# Altium PCB PCB.PcbDoc
Units mil, origin at the board's own origin, x right, y up, seen from the top; angles counter-clockwise.
Board outline 2380 x 2345 mil, 2 copper layers (Top Layer, Bottom Layer); 17 components, 16 nets, 111 pads, 3 vias.
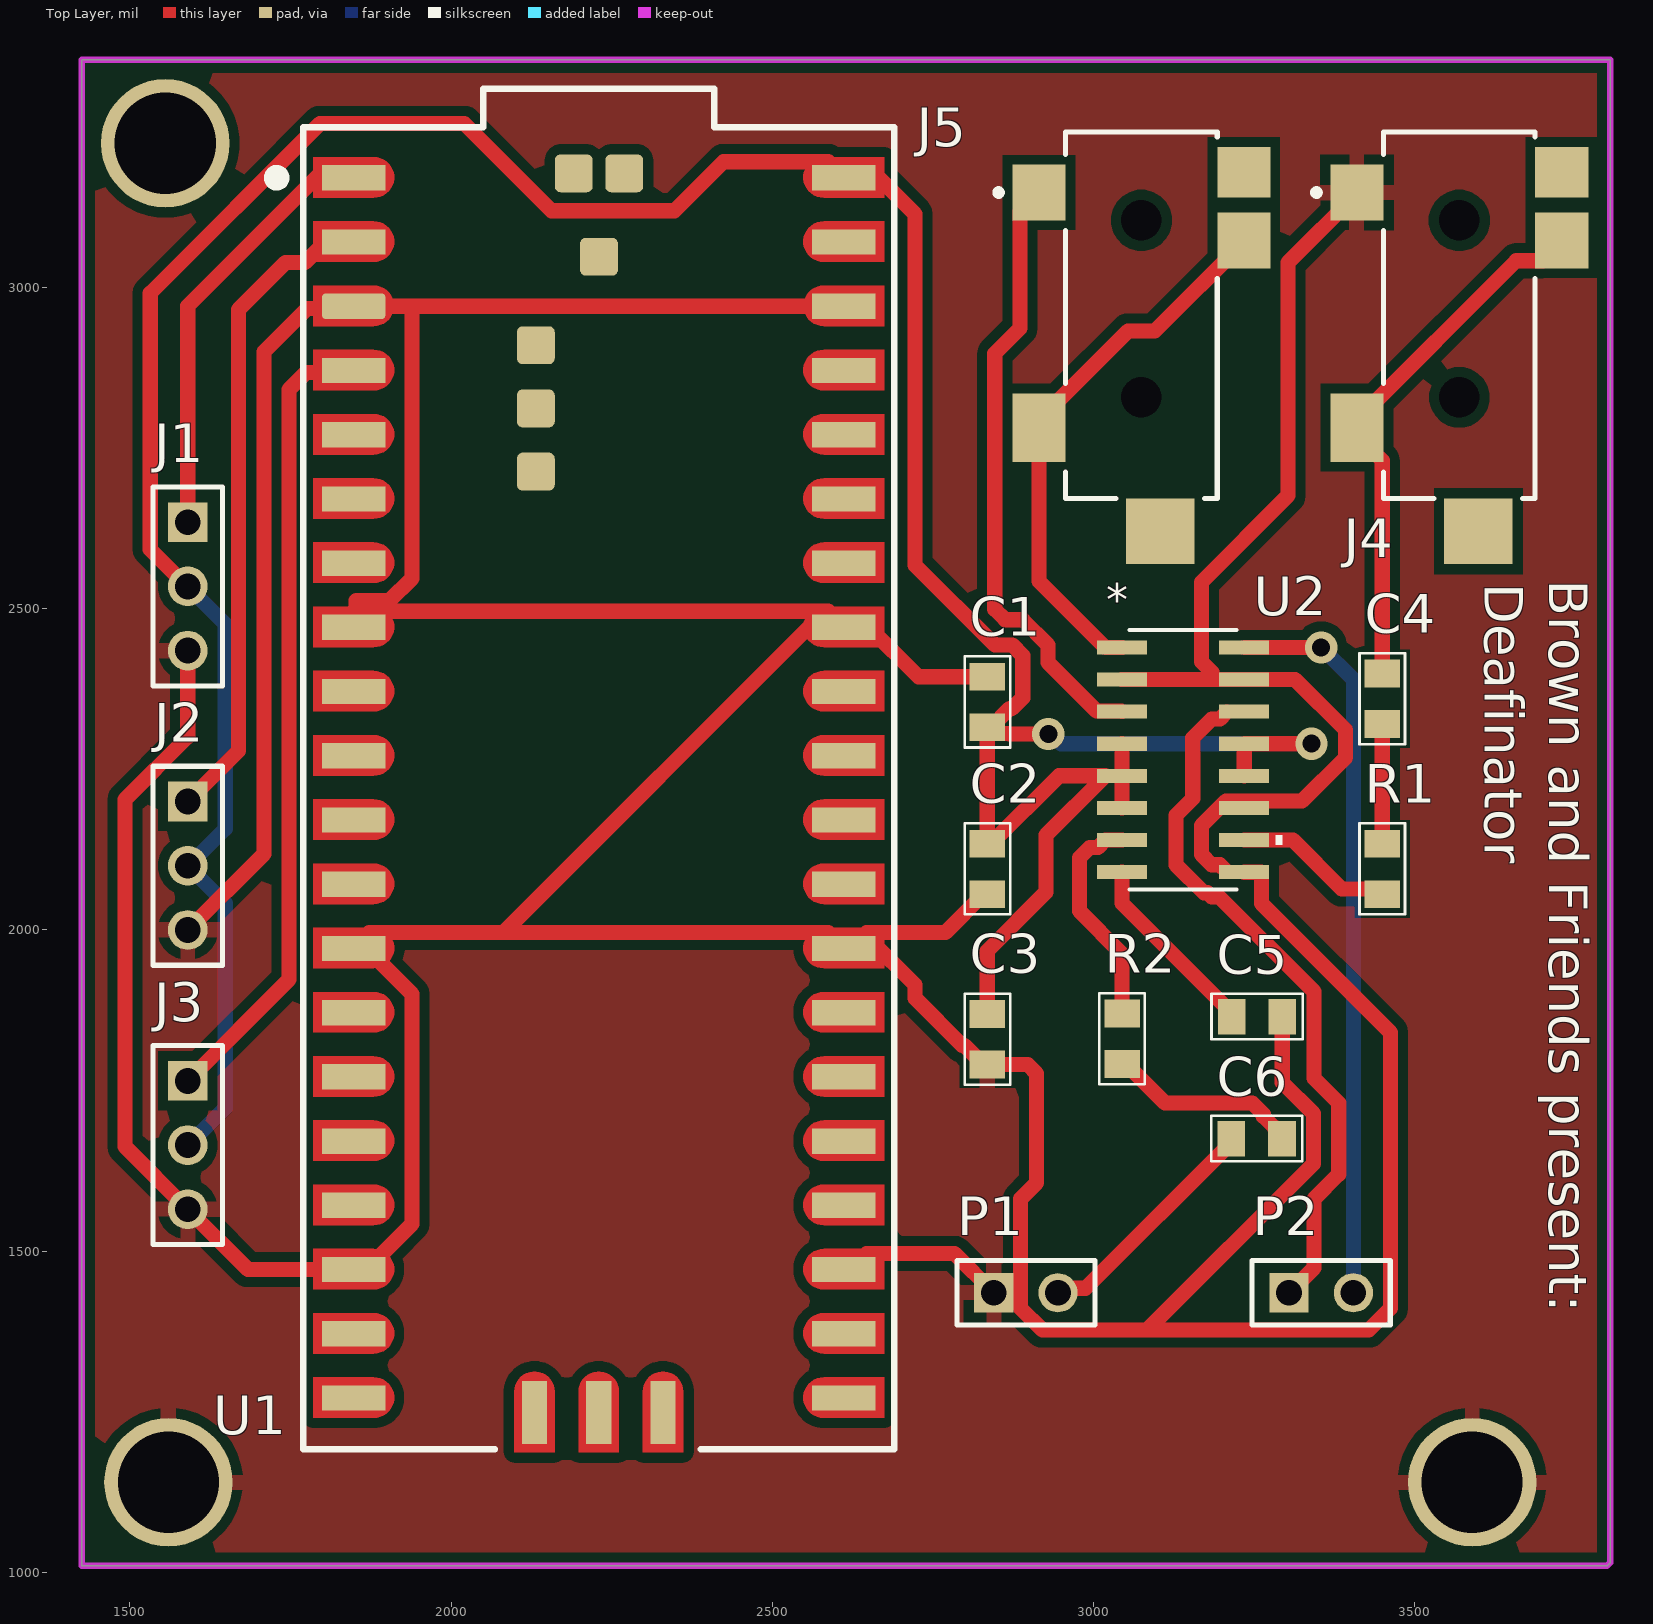
[diagram p0: Top Layer view]
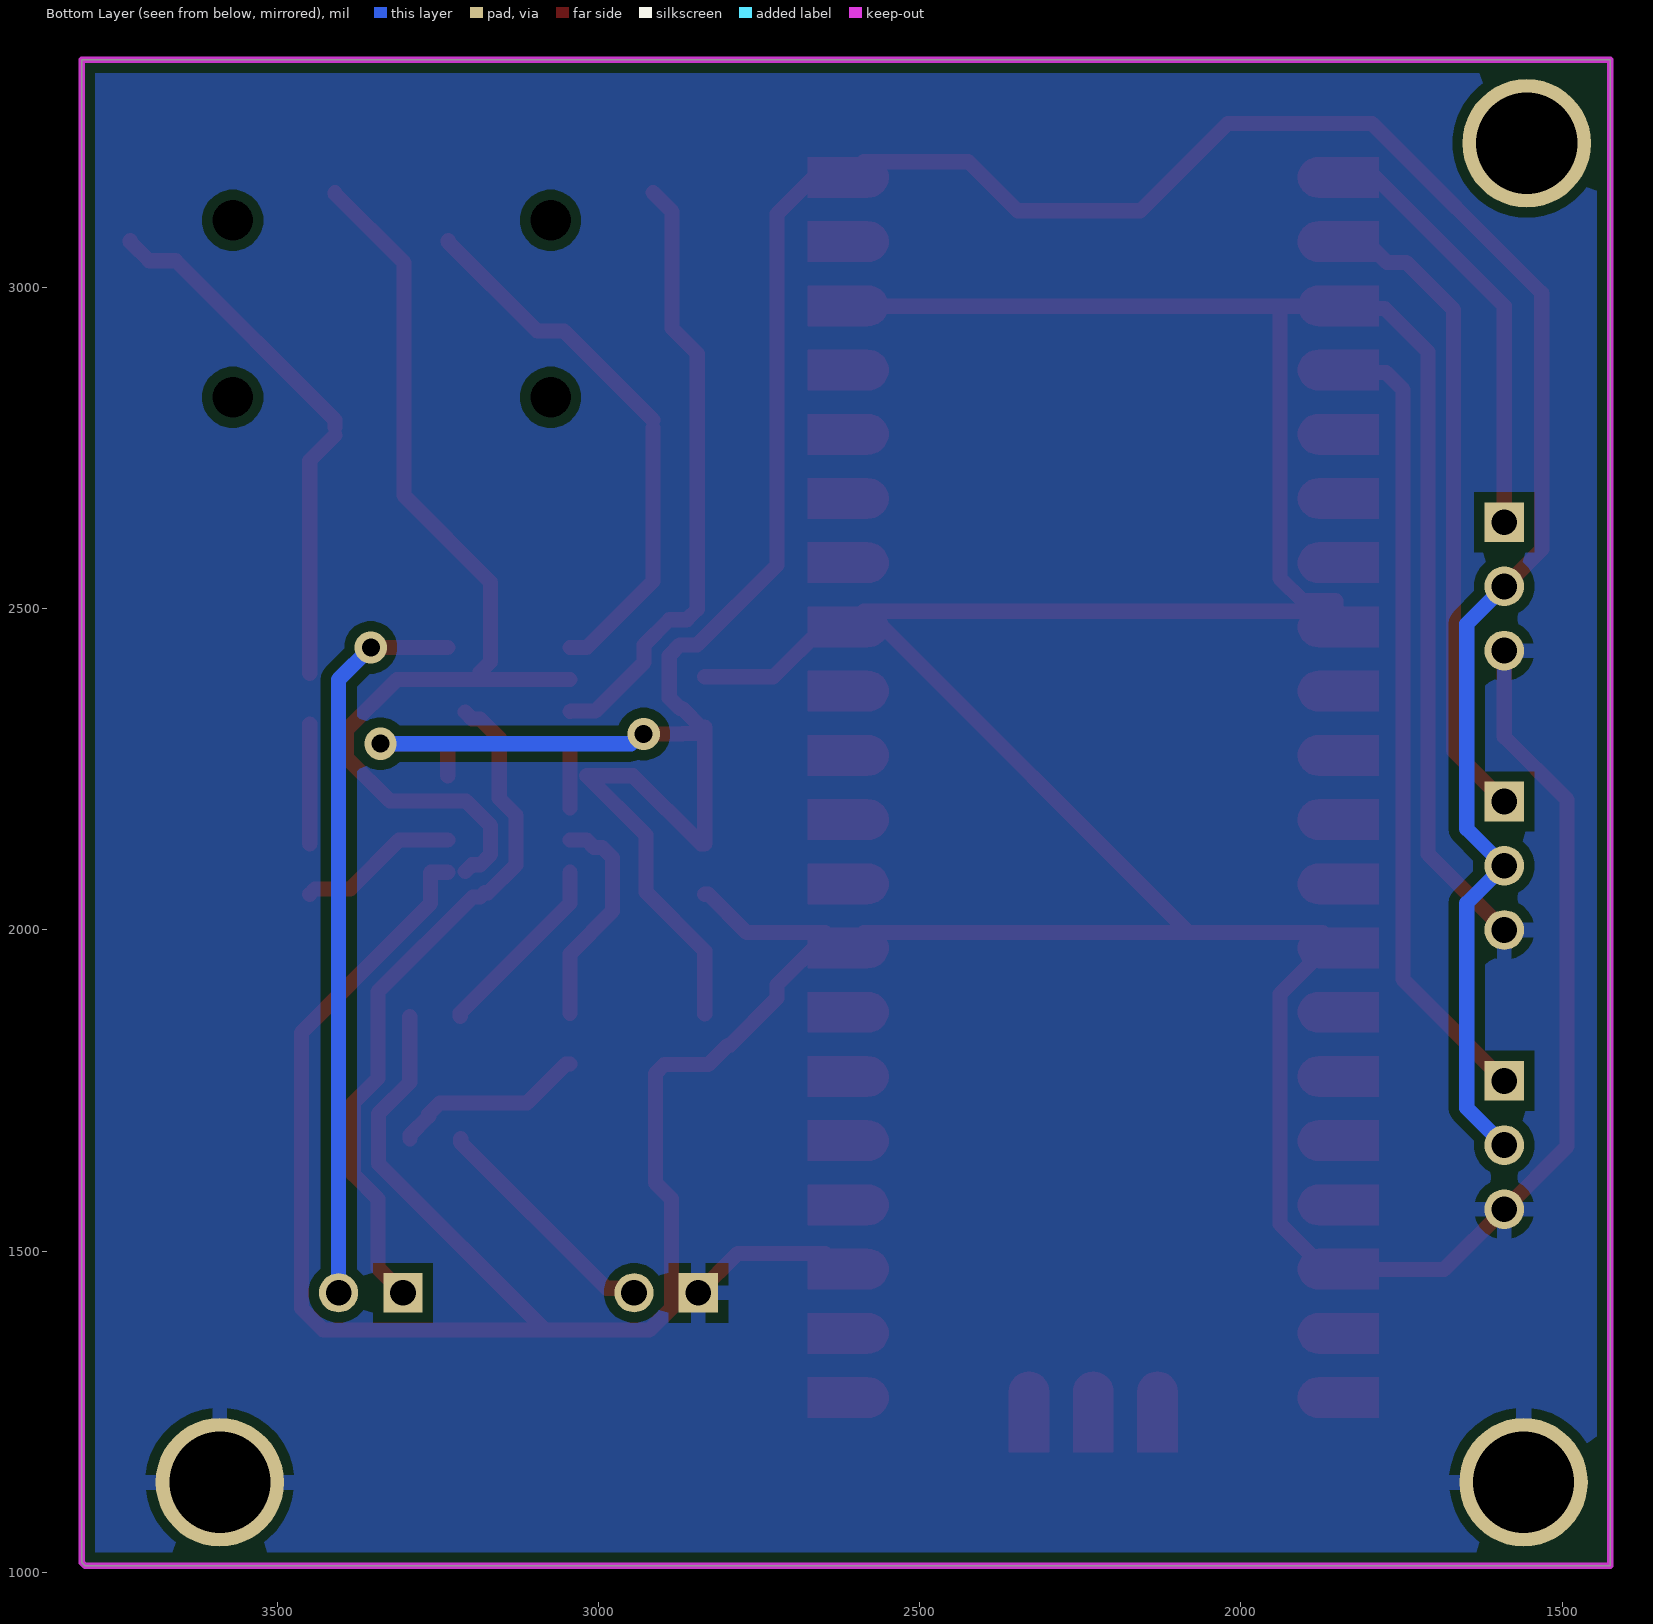
[diagram p1: Bottom Layer view, seen from below]

## Layer stack, top to bottom
Top Solder: solder mask 0.4, Solder Resist, Dk 3.5
Top Layer: signal copper 1.4
Dielectric 1: dielectric 12.6, FR-4, Dk 4.8
Bottom Layer: signal copper 1.4
Bottom Solder: solder mask 0.4, Solder Resist, Dk 3.5

## Board outline
1425,1010 3800,1010 3805,1015 3805,3355 1425,3355

## Design rules (kind name [scope] priority, off if disabled: settings)
Clearance [All] p1: gap=15.75 ignorepadtopadclearanceinfootprint=FALSE
Height [All] p1: minheight=0 maxheight=787.4 prefheight=500
HoleSize [All] p1: absolutevalues=TRUE maxlimit=393.7 minlimit=15.75 maxpercent=80.000 minpercent=20.000
PolygonConnect [All] p1: connectstyle=Relief reliefconductorwidth=23.62 reliefentries=4 polygonreliefangle="90 Angle" airgapwidth=15.75
RoutingVias [All] p1: holewidth=28 width=50 viastyle="Through Hole" minholewidth=28 minwidth=50 maxholewidth=28 maxwidth=50
SilkToSilkClearance [All] p1: silktosilkclearance=3.94
SilkToSolderMaskClearance [IsPad] p1: minsilkscreentomaskgap=3.94 clearancetoexposedcopper=TRUE
SolderMaskExpansion [All] p1: expansion=4 istentingtop=FALSE
SupplyNets "Schematic Supply Nets" [InNet('GND')] p1: voltage=0.000
Width [All] p1: maxlimit=393.7 minlimit=15.75 preferedwidth=23.62
26 further rules are at their usual default settings.

## Classes and differential pairs
component class Main: C1 C2 C3 C5 C6 J1 J2 J3 J5 P1 P2 R1 R2 U2

## Components (designator, comment, footprint, x,y, rotation, side; value= is the part's Value field where it differs from the comment)
C1 "*" "0805 CAP" 2835,2355 r90 top
C2 "*" "0805 CAP" 2835,2095 r270 top
C3 "*" "0805 CAP" 2835,1830 r270 top
C4 "*" "0805 CAP" 3450,2360 r90 top
C5 "*" "0805 CAP" 3255,1865 r0 top
C6 "*" "0805 CAP" 3254.37,1675 r180 top
J1 "22-28-4035" FP-22-28-4035-MFG 1590,2535 r270 top
J2 "22-28-4035" FP-22-28-4035-MFG 1590,2100 r270 top
J3 "22-28-4035" FP-22-28-4035-MFG 1590,1665 r270 top
J4 "35RASMT4BHNTRX" SWIT-35RASMT4BHNTRX_V 3570,2900.28 r270 top
J5 "35RASMT4BHNTRX" SWIT-35RASMT4BHNTRX_V 3075,2900.28 r270 top
P1 "TSW-102-26-F-S" SMTC-TSW-102-26-XX-S 2845,1435 r0 top
P2 "TSW-102-26-F-S" SMTC-TSW-102-26-XX-S 3305,1435 r0 top
R1 "*" "0805 RES" 3450,2095 r90 top
R2 "*" "0805 RES" 3045,1830.63 r270 top
U1 "RPI-PICO-MOD_SM" RPI-PICO-MOD 2230,2210 r0 top
U2 "PAM8406DR" SO-16_PAM8406_DIO 3140,2265 r0 top

## Footprints (in the part's own frame and the unit in brackets; to place one, negate y for a bottom-side part, rotate by r counter-clockwise, add the part's x,y. Pads: shape width x height; smd on the part's side, far side on the other; paste and mask are expansions set on the pad)
"0805 CAP" [mm] "http://www.digikey.co.nz/Web%20Export/Supplier%20Content/Vishay_8026/PDF/VishayBeyschlag_SolderPad.pdf?redirected=1 with dimension G modified by +0.25mm"
  rect 1.1x1.4 smd: 1(-1,0) 2(1,0)
  silkscreen extent -1.8,-0.9 1.8,0.9, body extent -1.04,-0.66 1.04,0.66, height 0.61
"0805 RES" [mm] "http://www.digikey.co.nz/Web%20Export/Supplier%20Content/Vishay_8026/PDF/VishayBeyschlag_SolderPad.pdf?redirected=1 with dimension G modified by +0.25mm"
  rect 1.1x1.4 smd: 1(-1,0) 2(1,0)
  silkscreen extent -1.8,-0.9 1.8,0.9, body extent -1.04,-0.66 1.04,0.66, height 0.61
FP-22-28-4035-MFG [mm]
  rect 1.57x1.57 hole 1.02 paste-2539.97 mask+0: 1(-2.54,0)
  round 1.57 hole 1.02 paste-2539.97 mask+0: 2(0,0) 3(2.54,0)
  silkscreen extent -3.94,-1.37 3.94,1.37, body extent -4.04,-1.47 4.04,1.47, height 0.25
RPI-PICO-MOD [mm] "RASPBERRY PI PICO RP2040 BOARD"
  rect 2.5x1 smd mask+0.102: 1(-9.69,24.415) 2(-9.69,21.875) 4(-9.69,16.795) 5(-9.69,14.255) 6(-9.69,11.715) 7(-9.69,9.175) 8(-9.69,6.635) 9(-9.69,4.095) 10(-9.69,1.555) 11(-9.69,-0.985) 12(-9.69,-3.525) 13(-9.69,-6.065) 14(-9.69,-8.605) 15(-9.69,-11.145) 16(-9.69,-13.685) 17(-9.69,-16.225) 18(-9.69,-18.765) 19(-9.69,-21.305) 20(-9.69,-23.845)
  rrect25% 2.5x1 smd mask+0.102: 3(-9.69,19.335)
  rect 2.5x1 smd: 21(9.69,-23.845) 22(9.69,-21.305) 23(9.69,-18.765) 24(9.69,-16.225) 25(9.69,-13.685) 26(9.69,-11.145) 27(9.69,-8.605) 28(9.69,-6.065) 29(9.69,-3.525) 30(9.69,-0.985) 31(9.69,1.555) 32(9.69,4.095) 33(9.69,6.635) 34(9.69,9.175) 35(9.69,11.715) 36(9.69,14.255) 37(9.69,16.795) 38(9.69,19.335) 39(9.69,21.875) 40(9.69,24.415)
  rect 1x2.5 smd: 41(-2.54,-24.415) 42(0,-24.415) 43(2.54,-24.415)
  rrect30% 1.5x1.5 smd: 44(0.01,21.292) 45(1.01,24.592) 46(-0.99,24.592) 47(-2.49,17.792) 48(-2.49,15.292) 49(-2.49,12.792)
  Top Layer region: -11.292,16.011 -11.292,17.611 -8.892,17.611 -8.892,17.611 -8.545,17.532 -8.267,17.31 -8.112,16.989 -8.112,16.633 -8.267,16.312 -8.545,16.09 -8.892,16.011 -8.892,16.011
  Top Layer region: 11.292,18.551 11.292,20.151 8.892,20.151 8.892,20.151 8.545,20.072 8.267,19.85 8.112,19.529 8.112,19.173 8.267,18.852 8.545,18.63 8.892,18.551 8.892,18.551
  Top Layer region: 11.292,5.851 11.292,7.451 8.892,7.451 8.892,7.451 8.545,7.372 8.267,7.15 8.112,6.829 8.112,6.473 8.267,6.152 8.545,5.93 8.892,5.851 8.892,5.851
  Top Layer region: -11.292,18.551 -11.292,20.151 -8.892,20.151 -8.892,20.151 -8.545,20.072 -8.267,19.85 -8.112,19.529 -8.112,19.173 -8.267,18.852 -8.545,18.63 -8.892,18.551 -8.892,18.551
  Top Layer region: 11.292,-6.849 11.292,-5.249 8.892,-5.249 8.892,-5.249 8.545,-5.328 8.267,-5.55 8.112,-5.871 8.112,-6.227 8.267,-6.548 8.545,-6.77 8.892,-6.849 8.892,-6.849
  Top Layer region: -11.292,-6.849 -11.292,-5.249 -8.892,-5.249 -8.892,-5.249 -8.545,-5.328 -8.267,-5.55 -8.112,-5.871 -8.112,-6.227 -8.267,-6.548 -8.545,-6.77 -8.892,-6.849 -8.892,-6.849
  Top Layer region: 11.292,-19.549 11.292,-17.949 8.892,-17.949 8.892,-17.949 8.545,-18.028 8.267,-18.25 8.112,-18.571 8.112,-18.927 8.267,-19.248 8.545,-19.47 8.892,-19.549 8.892,-19.549
  Top Layer region: -11.292,-19.549 -11.292,-17.949 -8.892,-17.949 -8.892,-17.949 -8.545,-18.028 -8.267,-18.25 -8.112,-18.571 -8.112,-18.927 -8.267,-19.248 -8.545,-19.47 -8.892,-19.549 -8.892,-19.549
  Top Layer region: -11.292,5.851 -11.292,7.451 -8.892,7.451 -8.892,7.451 -8.545,7.372 -8.267,7.15 -8.112,6.829 -8.112,6.473 -8.267,6.152 -8.545,5.93 -8.892,5.851 -8.892,5.851
  Top Layer region: 11.292,23.631 11.292,25.231 8.892,25.231 8.892,25.231 8.545,25.152 8.267,24.93 8.112,24.609 8.112,24.253 8.267,23.932 8.545,23.71 8.892,23.631 8.892,23.631
  Top Layer region: -11.292,21.091 -11.292,22.691 -8.892,22.691 -8.892,22.691 -8.545,22.612 -8.267,22.39 -8.112,22.069 -8.112,21.713 -8.267,21.392 -8.545,21.17 -8.892,21.091 -8.892,21.091
  Top Layer region: -11.292,23.631 -11.292,25.231 -8.892,25.231 -8.892,25.231 -8.545,25.152 -8.267,24.93 -8.112,24.609 -8.112,24.253 -8.267,23.932 -8.545,23.71 -8.892,23.631 -8.892,23.631
  Top Layer region: 11.292,-24.629 11.292,-23.029 8.892,-23.029 8.892,-23.029 8.545,-23.108 8.267,-23.33 8.112,-23.651 8.112,-24.007 8.267,-24.328 8.545,-24.55 8.892,-24.629 8.892,-24.629
  Top Layer region: 11.292,-22.089 11.292,-20.489 8.892,-20.489 8.892,-20.489 8.545,-20.568 8.267,-20.79 8.112,-21.111 8.112,-21.467 8.267,-21.788 8.545,-22.01 8.892,-22.089 8.892,-22.089
  Top Layer region: 11.292,-17.009 11.292,-15.409 8.892,-15.409 8.892,-15.409 8.545,-15.488 8.267,-15.71 8.112,-16.031 8.112,-16.387 8.267,-16.708 8.545,-16.93 8.892,-17.009 8.892,-17.009
  Top Layer region: 11.292,-14.469 11.292,-12.869 8.892,-12.869 8.892,-12.869 8.545,-12.948 8.267,-13.17 8.112,-13.491 8.112,-13.847 8.267,-14.168 8.545,-14.39 8.892,-14.469 8.892,-14.469
  Top Layer region: 11.292,-11.929 11.292,-10.329 8.892,-10.329 8.892,-10.329 8.545,-10.408 8.267,-10.63 8.112,-10.951 8.112,-11.307 8.267,-11.628 8.545,-11.85 8.892,-11.929 8.892,-11.929
  Top Layer region: 11.292,-9.389 11.292,-7.789 8.892,-7.789 8.892,-7.789 8.545,-7.868 8.267,-8.09 8.112,-8.411 8.112,-8.767 8.267,-9.088 8.545,-9.31 8.892,-9.389 8.892,-9.389
  Top Layer region: 11.292,-4.309 11.292,-2.709 8.892,-2.709 8.892,-2.709 8.545,-2.788 8.267,-3.01 8.112,-3.331 8.112,-3.687 8.267,-4.008 8.545,-4.23 8.892,-4.309 8.892,-4.309
  Top Layer region: 11.292,-1.769 11.292,-0.169 8.892,-0.169 8.892,-0.169 8.545,-0.248 8.267,-0.47 8.112,-0.791 8.112,-1.147 8.267,-1.468 8.545,-1.69 8.892,-1.769 8.892,-1.769
  Top Layer region: 11.292,0.771 11.292,2.371 8.892,2.371 8.892,2.371 8.545,2.292 8.267,2.07 8.112,1.749 8.112,1.393 8.267,1.072 8.545,0.85 8.892,0.771 8.892,0.771
  Top Layer region: 11.292,3.311 11.292,4.911 8.892,4.911 8.892,4.911 8.545,4.832 8.267,4.61 8.112,4.289 8.112,3.933 8.267,3.612 8.545,3.39 8.892,3.311 8.892,3.311
  Top Layer region: 11.292,8.391 11.292,9.991 8.892,9.991 8.892,9.991 8.545,9.912 8.267,9.69 8.112,9.369 8.112,9.013 8.267,8.692 8.545,8.47 8.892,8.391 8.892,8.391
  Top Layer region: 11.292,10.931 11.292,12.531 8.892,12.531 8.892,12.531 8.545,12.452 8.267,12.23 8.112,11.909 8.112,11.553 8.267,11.232 8.545,11.01 8.892,10.931 8.892,10.931
  Top Layer region: 11.292,13.471 11.292,15.071 8.892,15.071 8.892,15.071 8.545,14.992 8.267,14.77 8.112,14.449 8.112,14.093 8.267,13.772 8.545,13.55 8.892,13.471 8.892,13.471
  Top Layer region: 11.292,16.011 11.292,17.611 8.892,17.611 8.892,17.611 8.545,17.532 8.267,17.31 8.112,16.989 8.112,16.633 8.267,16.312 8.545,16.09 8.892,16.011 8.892,16.011
  Top Layer region: 11.292,21.091 11.292,22.691 8.892,22.691 8.892,22.691 8.545,22.612 8.267,22.39 8.112,22.069 8.112,21.713 8.267,21.392 8.545,21.17 8.892,21.091 8.892,21.091
  Top Layer region: -11.292,13.471 -11.292,15.071 -8.892,15.071 -8.892,15.071 -8.545,14.992 -8.267,14.77 -8.112,14.449 -8.112,14.093 -8.267,13.772 -8.545,13.55 -8.892,13.471 -8.892,13.471
  Top Layer region: -11.292,10.931 -11.292,12.531 -8.892,12.531 -8.892,12.531 -8.545,12.452 -8.267,12.23 -8.112,11.909 -8.112,11.553 -8.267,11.232 -8.545,11.01 -8.892,10.931 -8.892,10.931
  Top Layer region: -11.292,8.391 -11.292,9.991 -8.892,9.991 -8.892,9.991 -8.545,9.912 -8.267,9.69 -8.112,9.369 -8.112,9.013 -8.267,8.692 -8.545,8.47 -8.892,8.391 -8.892,8.391
  Top Layer region: -11.292,3.311 -11.292,4.911 -8.892,4.911 -8.892,4.911 -8.545,4.832 -8.267,4.61 -8.112,4.289 -8.112,3.933 -8.267,3.612 -8.545,3.39 -8.892,3.311 -8.892,3.311
  Top Layer region: -11.292,0.771 -11.292,2.371 -8.892,2.371 -8.892,2.371 -8.545,2.292 -8.267,2.07 -8.112,1.749 -8.112,1.393 -8.267,1.072 -8.545,0.85 -8.892,0.771 -8.892,0.771
  Top Layer region: -11.292,-1.769 -11.292,-0.169 -8.892,-0.169 -8.892,-0.169 -8.545,-0.248 -8.267,-0.47 -8.112,-0.791 -8.112,-1.147 -8.267,-1.468 -8.545,-1.69 -8.892,-1.769 -8.892,-1.769
  Top Layer region: -11.292,-4.309 -11.292,-2.709 -8.892,-2.709 -8.892,-2.709 -8.545,-2.788 -8.267,-3.01 -8.112,-3.331 -8.112,-3.687 -8.267,-4.008 -8.545,-4.23 -8.892,-4.309 -8.892,-4.309
  Top Layer region: -11.292,-9.389 -11.292,-7.789 -8.892,-7.789 -8.892,-7.789 -8.545,-7.868 -8.267,-8.09 -8.112,-8.411 -8.112,-8.767 -8.267,-9.088 -8.545,-9.31 -8.892,-9.389 -8.892,-9.389
  Top Layer region: -11.292,-11.929 -11.292,-10.329 -8.892,-10.329 -8.892,-10.329 -8.545,-10.408 -8.267,-10.63 -8.112,-10.951 -8.112,-11.307 -8.267,-11.628 -8.545,-11.85 -8.892,-11.929 -8.892,-11.929
  Top Layer region: -11.292,-14.469 -11.292,-12.869 -8.892,-12.869 -8.892,-12.869 -8.545,-12.948 -8.267,-13.17 -8.112,-13.491 -8.112,-13.847 -8.267,-14.168 -8.545,-14.39 -8.892,-14.469 -8.892,-14.469
  Top Layer region: -11.292,-17.009 -11.292,-15.409 -8.892,-15.409 -8.892,-15.409 -8.545,-15.488 -8.267,-15.71 -8.112,-16.031 -8.112,-16.387 -8.267,-16.708 -8.545,-16.93 -8.892,-17.009 -8.892,-17.009
  Top Layer region: -11.292,-22.089 -11.292,-20.489 -8.892,-20.489 -8.892,-20.489 -8.545,-20.568 -8.267,-20.79 -8.112,-21.111 -8.112,-21.467 -8.267,-21.788 -8.545,-22.01 -8.892,-22.089 -8.892,-22.089
  Top Layer region: -11.292,-24.629 -11.292,-23.029 -8.892,-23.029 -8.892,-23.029 -8.545,-23.108 -8.267,-23.33 -8.112,-23.651 -8.112,-24.007 -8.267,-24.328 -8.545,-24.55 -8.892,-24.629 -8.892,-24.629
  Top Layer region: 3.34,-25.999 1.74,-25.999 1.74,-23.599 1.74,-23.599 1.819,-23.252 2.041,-22.974 2.362,-22.819 2.718,-22.819 3.039,-22.974 3.261,-23.252 3.34,-23.599 3.34,-23.599
  Top Layer region: 0.8,-25.999 -0.8,-25.999 -0.8,-23.599 -0.8,-23.599 -0.721,-23.252 -0.499,-22.974 -0.178,-22.819 0.178,-22.819 0.499,-22.974 0.721,-23.252 0.8,-23.599 0.8,-23.599
  Top Layer region: -1.74,-25.999 -3.34,-25.999 -3.34,-23.599 -3.34,-23.599 -3.261,-23.252 -3.039,-22.974 -2.718,-22.819 -2.362,-22.819 -2.041,-22.974 -1.819,-23.252 -1.74,-23.599 -1.74,-23.599
  silkscreen extent -12.99,-25.88 11.68,27.94, body extent -10.49,-25.21 10.51,27.22, height 3.69
SMTC-TSW-102-26-XX-S [mm] ".025 SQ Post Terminal Strip Assembly, 1x2 Pins, Vertical, 2.54mm Pitch, Male"
  rect 1.55x1.55 hole 1.02: 1(0,0)
  round 1.55 hole 1.02: 2(2.54,0)
  silkscreen extent -1.46,-1.27 4,1.27, body extent -1.4,-1.27 3.81,1.27, height 8.38
SO-16_PAM8406_DIO [mil]
  rect 78x22 smd paste+0 mask+0: 1(-95,175) 2(-95,125) 3(-95,75) 4(-95,25) 5(-95,-25) 6(-95,-75) 7(-95,-125) 8(-95,-175) 9(95,-175) 10(95,-125) 11(95,-75) 12(95,-25) 13(95,25) 14(95,75) 15(95,125) 16(95,175)
  silkscreen extent -84,-202 154,202, body extent -120,-197 120,197, height 50
SWIT-35RASMT4BHNTRX_V [mm] "Jack, 5-Leads, Body 17x6mm"
  rect 2.2x2.1 smd: 1(-6.3,-4.05) 2(-4.4,4.05)
  rect 2.7x2.1 smd: 3(3,-4.05)
  rect 2x2.1 smd: 4(-7.1,4.05)
  rect 2.6x2.7 smd: 5(7.1,0.75)
  rect 0x0 hole 1.6 unplated: MH(-5.2,0) MH(1.8,0)
  silkscreen extent -8.7,-5.77 5.8,3, body extent -11.2,-3 5.8,3, height 5

## Part data
C1 C2 C3 C4 C5 C6: library part CerCap_SMT_0805, "SMT ceramic capacitor 0805 size"
J1 J2 J3: library part CMP-00257-00247547-1, "22-28-4035 BOARD-BOARD Connector HEADER, 3WAY, 1ROW; Series: KK; Pitch Spacing: 2.54mm; No. of Rows: 1;", Color=Black, Contact Resistance=20mΩ, Current Rating=4A, Manufacturer Lifecycle Status=ACTIVE, Max Operating Temperature=75°C, Max Voltage Rating (DC)=250.25kV, Min Operating Temperature=0°C, Voltage Rating=250V, Connector Type="Male Pin", Contact Material=Brass, Contact Mating Length=7.493mm, Contact Plating=Gold, Country of Origin=US, Gender=Male, Glow Wire Compliant=Non-compliant, Housing Color=Black, Housing Material=Thermoplastic, Lead Free="Lead Free", Lifecycle Status=Production, Mount="Through Hole", NexarPartId=247547, Number of Circuits=3, Number of Contacts=3, Number of Positions=3, Number of Rows=1, Orientation=Vertical, Packaging=Bulk, Pitch=2.54mm, Plating=Tin, REACH SVHC=Unknown, RoHS=Compliant, Schedule B=8536694040, Termination="Through Hole"
J4 J5: library part CMP-1772-00001-1, "Female 3.5 mm Phone Jack, 5 Position, Height 5 mm, RoHS, Tape and Reel", Current Rating="50 mA", Package Quantity=3000, Voltage Rating (DC)="12 V", ComponentLink1Description="Manufacturer URL", ComponentLink1URL=http://www.switchcraft.com/, ComponentLink2Description=Datasheet, ComponentLink2URL=http://www.switchcraft.com/Drawings/35rasmt4bhntrx_cd.pdf, Contact Material=Silver, Contact Plating=Silver, DatasheetVersion="Rev. C, 07/2014", Mount="Through Hole", PackageDescription="Female 3.5 mm Phone Jack, 5 Position, Height 5 mm", PackageReference=35RASMT4BHNTRX, Packaging="Tape and Reel", RoHSCompliant=true
P1 P2: library part CMP-1024-00329-1, "0.025\" SQ Post Header, Through-hole, Vertical, -55 to 125 degC, 2.54 mm Pitch, 2-Pin, Male, RoHS", Manufacturer=Samtec, Temperature Range="-55 to 125 degC", ComponentLink1Description="Manufacturer URL", ComponentLink1URL=http://www.samtec.com, ComponentLink2Description=Datasheet, ComponentLink2URL=http://www.samtec.com/documents/webfiles/pdf/TSW_TH.PDF, ComponentLink3Description="Package Specification", ComponentLink3URL=http://www.samtec.com/documents/webfiles/cpdf/TSW-XXX-XX-XXX-X-XX-XXX-MKT.pdf, DatasheetVersion=F-214, Mounting Technology=Through-hole, Orientation=Vertical, PackageDescription=".025[0.64] SQ. Post Terminal Strip Assembly", PackageReference=TSW-102-26-XX-S, PackageVersion="DM, 8/1988", PartNumber=TSW-102-26-F-S, Pitch="2.54 mm", RoHS=True
R1 R2: library part Res_SMT_0805, "0805 resistor", ComponentLink1Description=https://nz.mouser.com/datasheet/2/315/AOA0000C304-1149620.pdf, LatestRevisionDate=17-Jul-2002, LatestRevisionNote="Re-released for DXP Platform.", PackageReference=AXIAL-0.4, Published=8-Jun-2000, Publisher="Altium Limited"
U1: "RASPBERRY PI PICO RP2040 BOARD NO TEST PADS", Manufacturer="Raspberry Pi Foundation", Manufacturer Part No=SC0915, Supplier Part No=2648-SC0915CT-ND, Mounting Technology=SMT, Supplier=DigiKey, Supplier Link=https://www.digikey.com/en/products/detail/raspberry-pi/SC0915/13684020
U2: "Description", Manufacturer_Name="Diodes Inc", Copyright="Copyright (C) 2025 Ultra Librarian. All rights reserved.", Manufacturer_Part_Number=PAM8406DR, RefDes=RefDes, Type=Type

## Free pads (board coordinates)
  round 200 hole 157.48: 2(1555,3225) 2(1560,1140) 2(3590,1140)

## Via types
v1: diameter 50, hole 28, Top Layer to Bottom Layer, 3 vias

## Nets (pads, with @x,y where several pads share a name; then routed paths per layer and width w, separated by ;. In a path a pad name is that pad's centre, name@x,y a point inside that pad or via, vN(x,y) a via of type N, cw(c..) or ccw(c..) an arc to the next point about the centre after c; other vN are vias at no path point)
"Audio In": C4.2 J4.2 J4.3 | length 835
  Top Layer w23.62: J4.3@3410.55,2770.35 3450,2730.91 C4.2 ; J4.3 3410.55,2793.98 3658.58,3042.01 3699.92,3042.01 3729.45,3071.54 J4.2
GND: C1.2 C2.2 C3.2 C5.2 J1.3 J2.3 J3.3 J4.1 P1.1 pad.2@1560,1140 pad.2@3590,1140 U1.3 U1.8 U1.13 U1.18 U1.23 U1.28 U1.33 U1.38 U2.2 U2.9 U2.11 U2.15 | length 11755.6
  Top Layer w23.62: J2.3 1708.5,2118.5 1708.5,2900.39 1776.03,2967.91 1845.2,2967.91 U1.3 1938.98,2971.22 ; J1.3 1590,2300.79 1492.17,2202.95 1492.17,1662.83 J3.3 1683.78,1471.22 U1.18 1868.19,1471.22 1938.98,1542.01 1938.98,1900.43 1868.19,1971.22 U1.13 1864.66,1971.22 1872.53,1979.09 1872.53,1996.22 2081.81,1996.22 ; U1.8 1850.31,2471.22 1858.19,2479.09 1858.19,2496.22 2587.47,2496.22 2587.47,2479.09 2603.62,2479.09 U1.33 2650.87,2471.22 2727.72,2394.37 C1.2 ; 1848.5,2496.22 1852.36,2500.08 1852.36,2512.8 1904.38,2512.8 1938.98,2547.39 1938.98,2971.22 ; U1.33@2570.22,2484.63 2081.81,1996.22 ; U1.23 2639.13,1471.22 2647.01,1479.09 2647.01,1496.22 2783.78,1496.22 P1.1 ; U1.38 1938.98,2971.22 ; U1.28@2652.5,1984.59 2722.38,1914.7 2722.38,1893.8 2796.03,1820.16 2799.57,1820.16 2829.09,1790.63 C3.2 2835.12,1790.51 2897.99,1790.51 2911.83,1776.67 2911.83,1606.26 2886.93,1581.36 2886.93,1410.95 2920.95,1376.93 3083.86,1376.93 ; C2.2 2829.09,2055.63 2769.69,1996.22 2647.01,1996.22 2647.01,1979.09 2639.13,1971.22 U1.28 2595.34,1971.22 2587.47,1979.09 2587.47,1996.22 2081.81,1996.22 ; U2.2 U2.15 3314.33,2390 3392.56,2311.77 3392.56,2268.23 3324.96,2200.63 3206.66,2200.63 3168.44,2162.42 3168.44,2117.58 3184.58,2101.44 3197.18,2101.44 U2.9@3207.81,2090.81 ; 3184.58,2401.44 3168.44,2417.58 3168.44,2541.36 3303.35,2676.26 3303.35,3039.13 3410.55,3146.34 J4.1 ; U2.9 3261.38,2090 3262.19,2089.19 3262.19,2041.05 3463.07,1840.16 3463.07,1410.95 3429.05,1376.93 3083.86,1376.93 ; C5.2 3294.37,1762.56 3342.95,1713.97 3342.95,1636.03 3083.86,1376.93
"Mic Out +": J5.2 J5.3 U2.1 | length 847.1
  Top Layer w23.62: J5.3 2915.55,2543.07 3018.62,2440 U2.1 ; J5.3@2915.55,2793.98 3054.33,2932.76 3095.67,2932.76 3234.45,3071.54 J5.2
"Mic Out -": J5.1 U2.3 | length 957.8
  Top Layer w23.62: J5.1 2886.02,3118.78 2886.02,2936.89 2846.65,2897.52 2846.65,2499.37 2863.07,2482.95 2890.28,2482.95 2929.49,2443.75 2929.49,2416.54 3005.21,2340.81 3044.19,2340.81 U2.3
NetC4_1: C4.1 R1.2 | length 186.3
  Top Layer w23.62: R1.2 C4.1
NetC5_1: C5.1 U2.8 | length 295.7
  Top Layer w23.62: U2.8 3045,2041.54 3215.63,1870.91 C5.1
NetC6_1: C6.1 R2.2 | length 302.4
  Top Layer w23.62: R2.2 3050.91,1791.26 3111.54,1730.63 3247.56,1730.63 3264.77,1713.41 3264.77,1709.87 3293.74,1680.91 C6.1
NetC6_2: C6.2 P1.2 | length 372.9
  Top Layer w23.62: P1.2 2952.16,1442.16 2988.06,1442.16 3215,1669.09 C6.2
NetJ1_1: J1.1 U1.1 | length 694.4
  Top Layer w23.62: J1.1 1590,2971.42 1799.47,3180.89 1804.92,3186.34 1812.99,3186.34 1812.99,3179.09 1820.87,3171.22 U1.1
NetJ2_1: J2.1 U1.2 | length 1021.9
  Top Layer w23.62: J2.1 1669.13,2279.13 1669.13,2966.22 1742.2,3039.29 1772.64,3039.29 1804.57,3071.22 U1.2
NetJ3_1: J3.1 U1.4 | length 1255
  Top Layer w23.62: J3.1 1747.87,1922.87 1747.87,2841.77 1774.02,2867.91 1845.2,2867.91 U1.4
NetP2_1: P2.1 U2.14 | length 1091.2
  Top Layer w23.62: U2.14@3207.81,2339.19 3197.18,2328.56 3184.58,2328.56 3155,2298.97 3155,2204.65 3129.07,2178.72 3129.07,2101.28 3172.35,2058 3178.03,2058 3184.58,2051.44 3196.12,2051.44 3343.58,1903.97 3343.58,1769.02 3382.32,1730.28 3382.32,1619.72 3343.58,1580.98 3343.58,1473.58 P2.1
NetP2_2: P2.2 U2.16 | length 1145.7
  Top Layer w23.62: U2.16 v1(3355,2440)
  Bottom Layer w23.62: v1(3355,2440) 3405,2390 P2.2
NetR1_1: R1.1 U2.10 | length 249.9
  Top Layer w23.62: U2.10 3310.96,2140 3387.01,2063.95 3441.68,2063.95 R1.1
NetR2_1: R2.1 U2.7 | length 348
  Top Layer w23.62: R2.1 3045,1962.85 2978.44,2029.41 2978.44,2112.42 2994.58,2128.56 3007.18,2128.56 3018.62,2140 U2.7
Vcc: C1.1 C2.1 C3.1 J1.2 J2.2 J3.2 U1.40 U2.4 U2.5 U2.6 U2.12 U2.13 | length 5386.7
  Top Layer w23.62: J1.2 1589.21,2535 1531.54,2592.68 1531.54,2991.54 1795.91,3255.91 2020.47,3255.91 2156.38,3120 2347.81,3120 2424.03,3196.22 2587.47,3196.22 2587.47,3179.09 2595.34,3171.22 U1.40 ; U1.40@2650.87,3171.22 2658.37,3178.72 2722.38,3114.7 2722.38,2567.97 2846.77,2443.58 2873.97,2443.58 2890.12,2427.44 2890.12,2361.3 2873.41,2344.6 2869.87,2344.6 2840.91,2315.63 C1.1 ; C3.1 2835,1967.44 2926.41,2058.85 2926.41,2147.78 3018.62,2240 2946.54,2240 2840.91,2134.37 C2.1 C1.1 ; v1(2930,2305) 2869.57,2305 2868.78,2305.79 2844.84,2305.79 C1.1 ; U2.6 U2.5 U2.4 ; U2.12 U2.13 v1(3340,2290)
  Bottom Layer w23.62: J3.2 1590.79,1665 1648.46,1722.68 1648.46,2041.54 J2.2 1590.79,2100 1648.46,2157.68 1648.46,2476.54 J1.2 ; v1(2930,2305) 2935,2305 2950,2290 v1(3340,2290)
pads on no net: J4.4 J4.5 J4.MH J5.4 J5.5 J5.MH U1.5 U1.6 U1.7 U1.9 U1.10 U1.11 U1.12 U1.14 U1.15 U1.16 U1.17 U1.19 U1.20 U1.21 U1.22 U1.24 U1.25 U1.26 U1.27 U1.29 U1.30 U1.31 U1.32 U1.34 U1.35 U1.36 U1.37 U1.39 U1.41 U1.42 U1.43 U1.44 U1.45 U1.46 U1.47 U1.48 U1.49

## Polygon pours and split planes (outlines as drawn)
GND on Bottom Layer "NONET_L01_P-001" (solid, remove dead copper, pour order 1): 7012.5,5005 7012.5,1005 4247.5,1005 1012.5,1005 1012.5,5005 5482.5,5005
GND on Top Layer "NONET_L01_P-001" (solid, remove dead copper, pour order 0): 7000.62,4999.65 7000.62,999.65 4235.62,999.65 1000.62,999.65 1000.62,4999.65 5470.62,4999.65

## Keep-outs
Keep-Out Layer:
  lines w10: 1425,1010 3800,1010 3805,1015 3805,3355 3775,3355 1425,3355 1425,1010

## Silkscreen, mask and mechanical layers (free items; w line width, h text height)
Top Overlay:
  text "Brown and Friends present:" at 3709.99,2545 h60 r270
  text "Deafinator" at 3610,2540 h60 r270

## Text inside footprints (layer, text, board x,y; h text height)
U2: Top 3D Body "*" at 3064,2409 h50; Top Overlay "*" at 3020,2490 h50